# Altium PCB BSPD.PcbDoc
Units mil, origin at the board's own origin, x right, y up, seen from the top; angles counter-clockwise.
Board outline 2490 x 2755 mil, 4 copper layers (Top Layer, 5V, GND, Bottom Layer), stack 23.756 mil thick; 30 components, 27 nets, 148 pads, 2 vias.
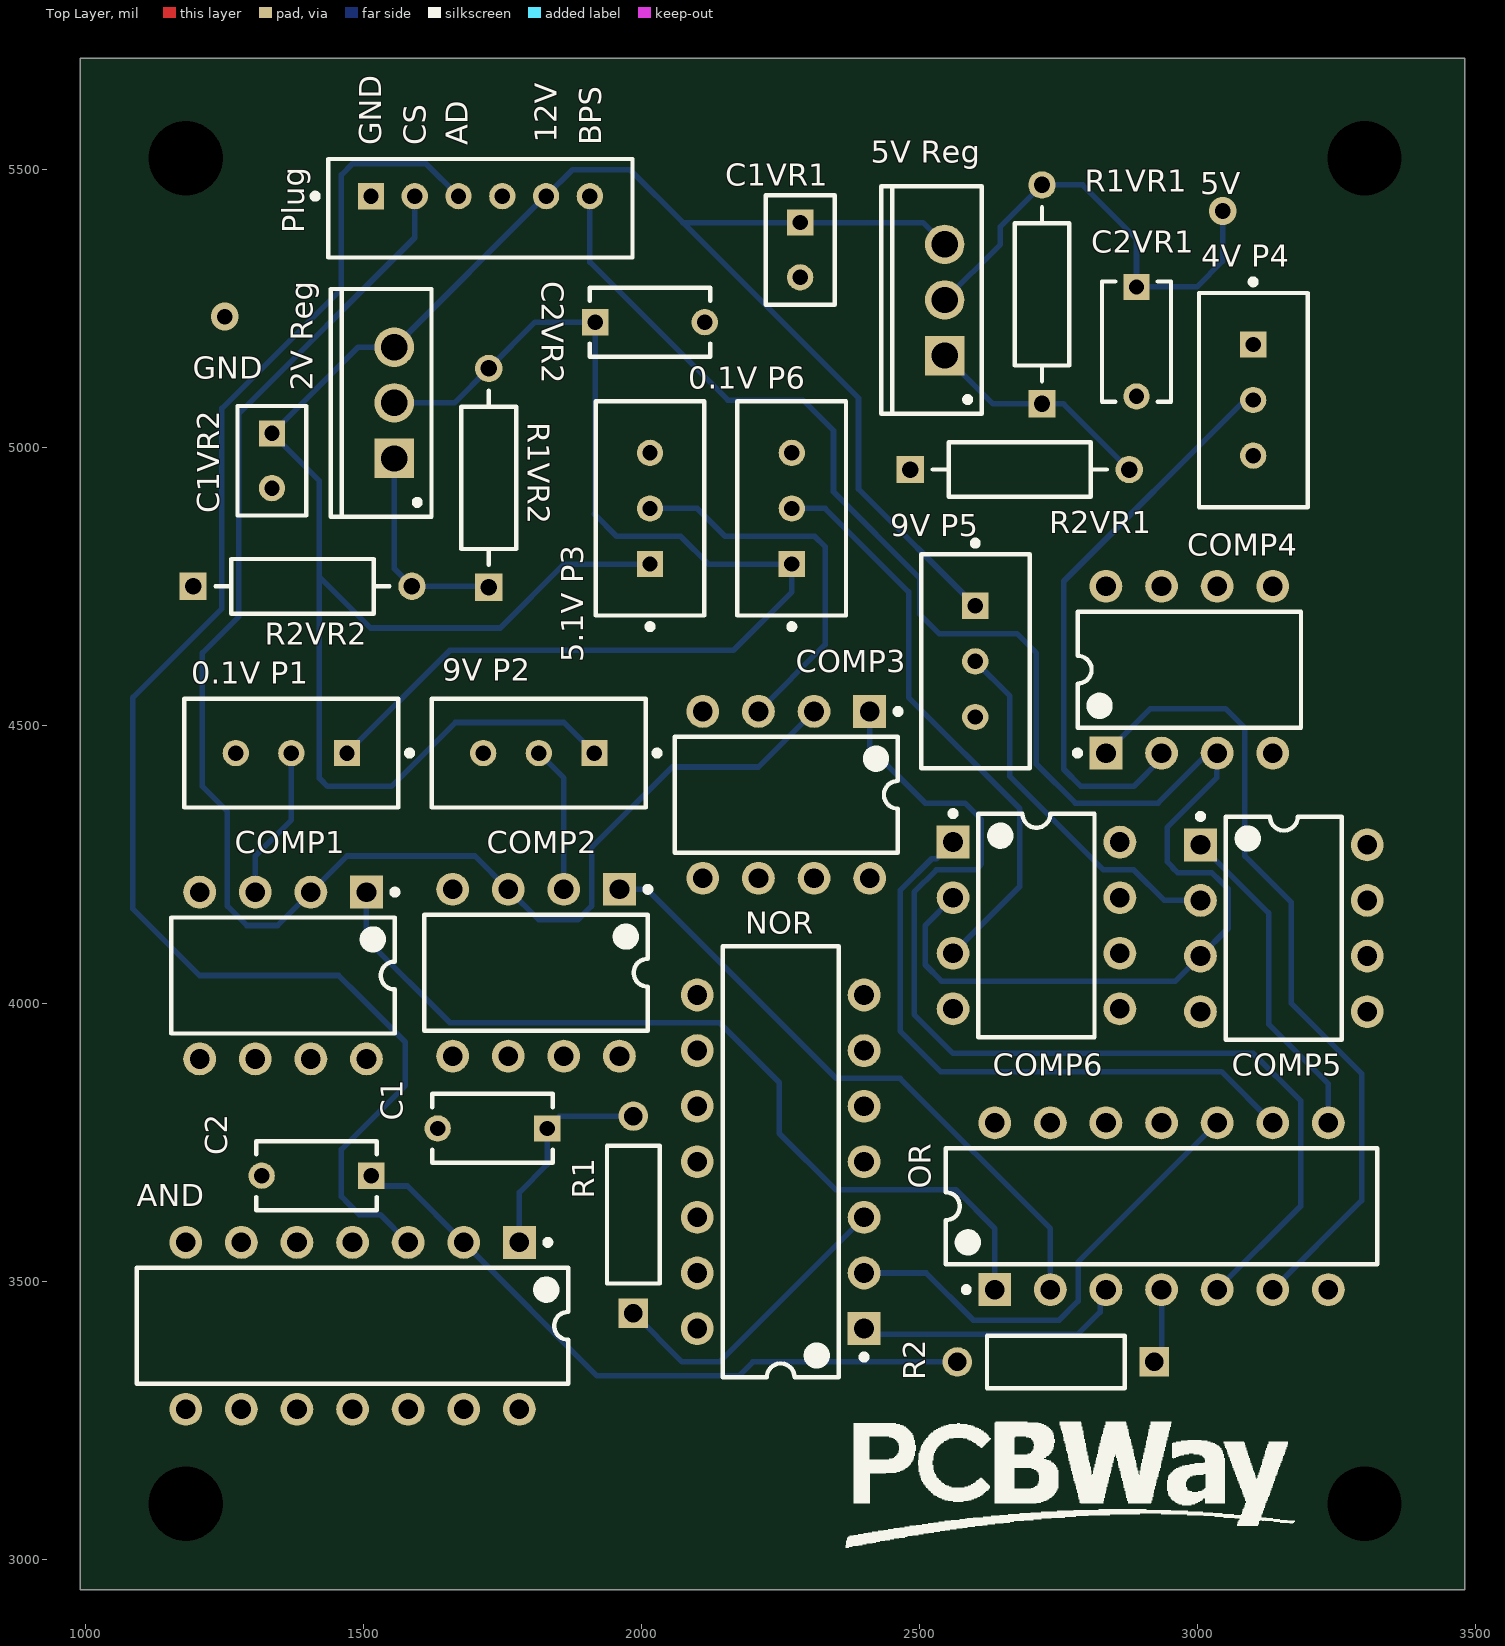
[diagram p0: Top Layer view]
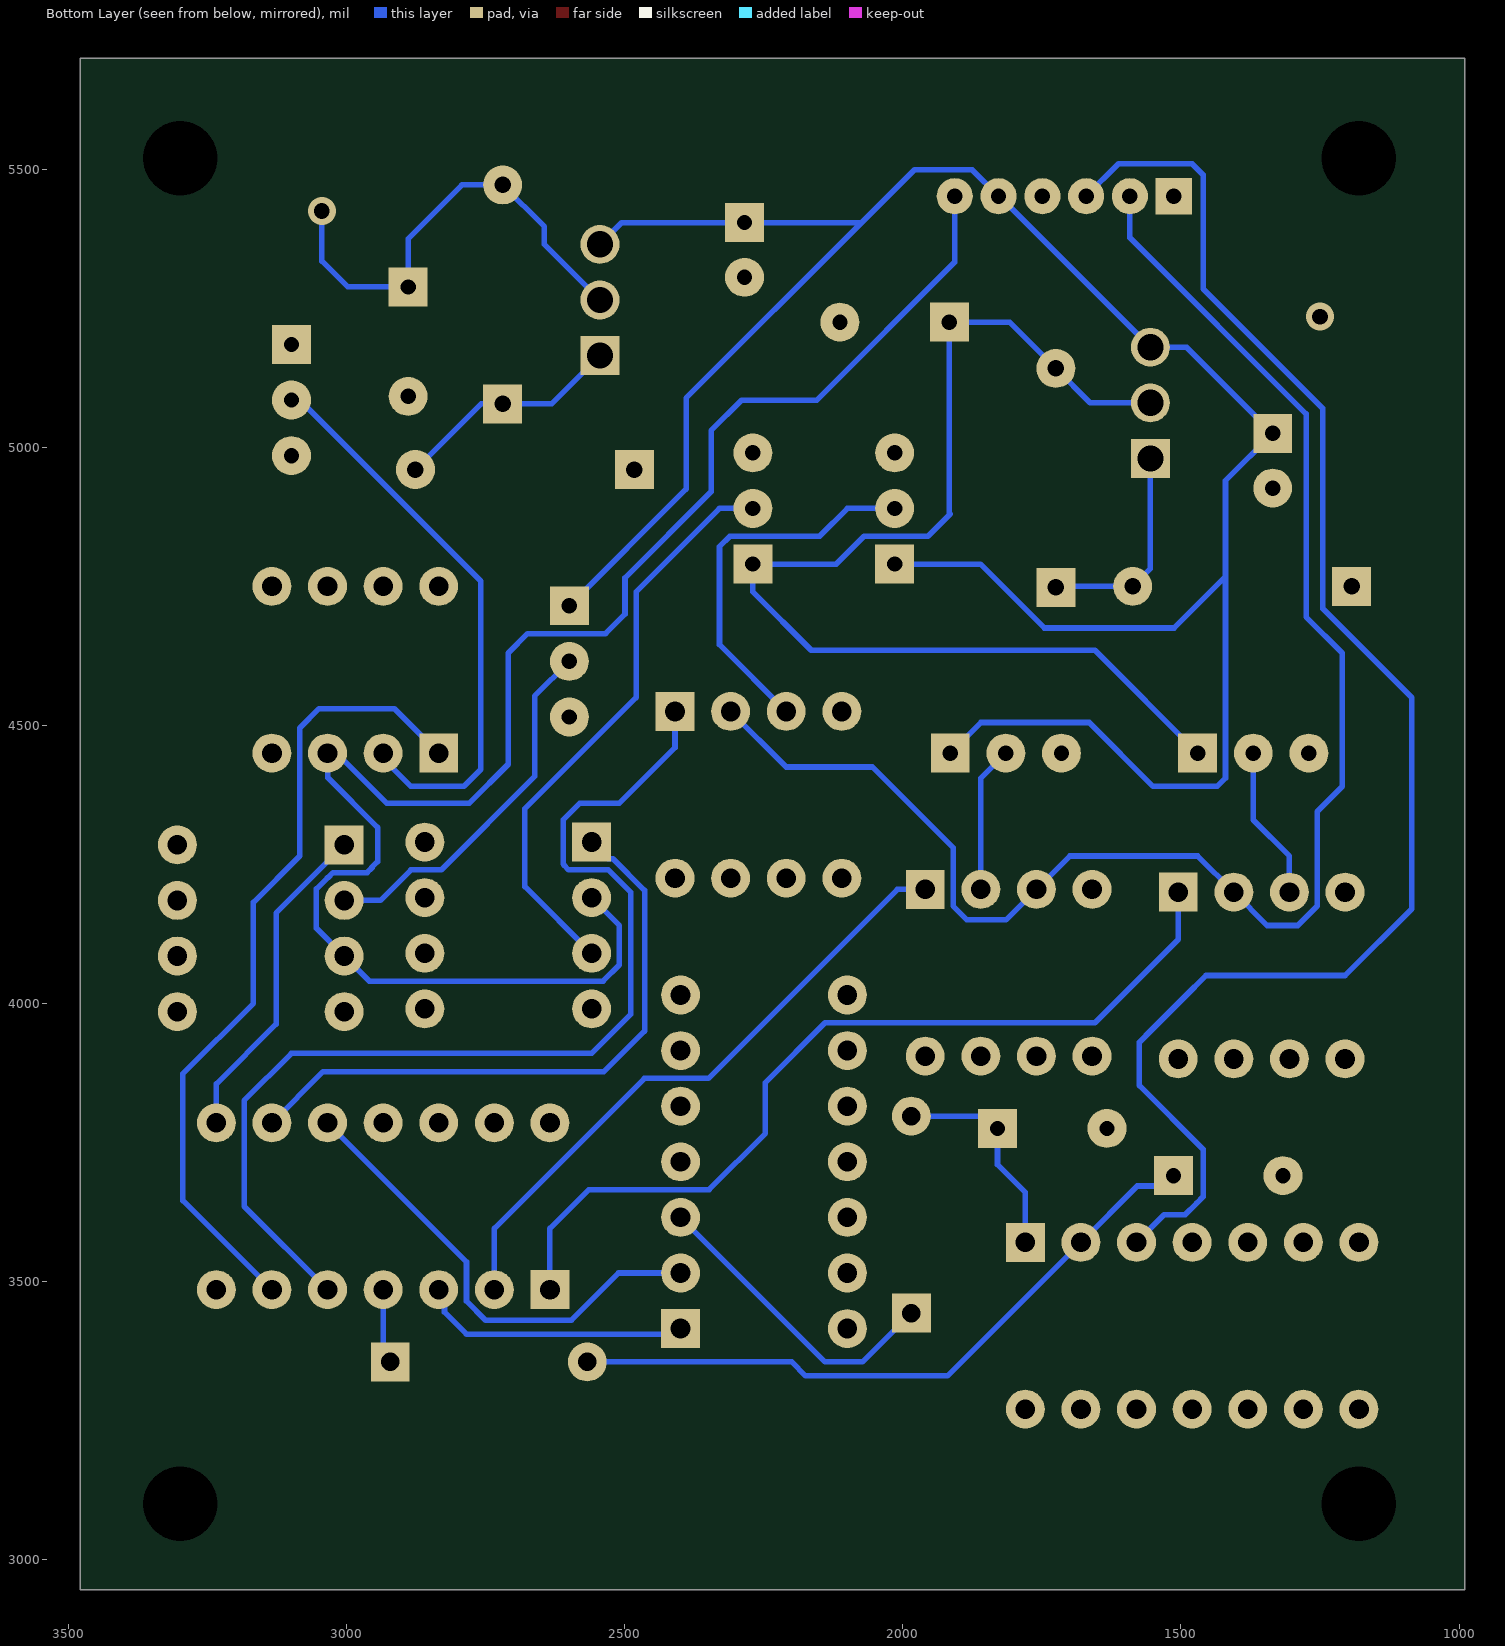
[diagram p1: Bottom Layer view, seen from below]
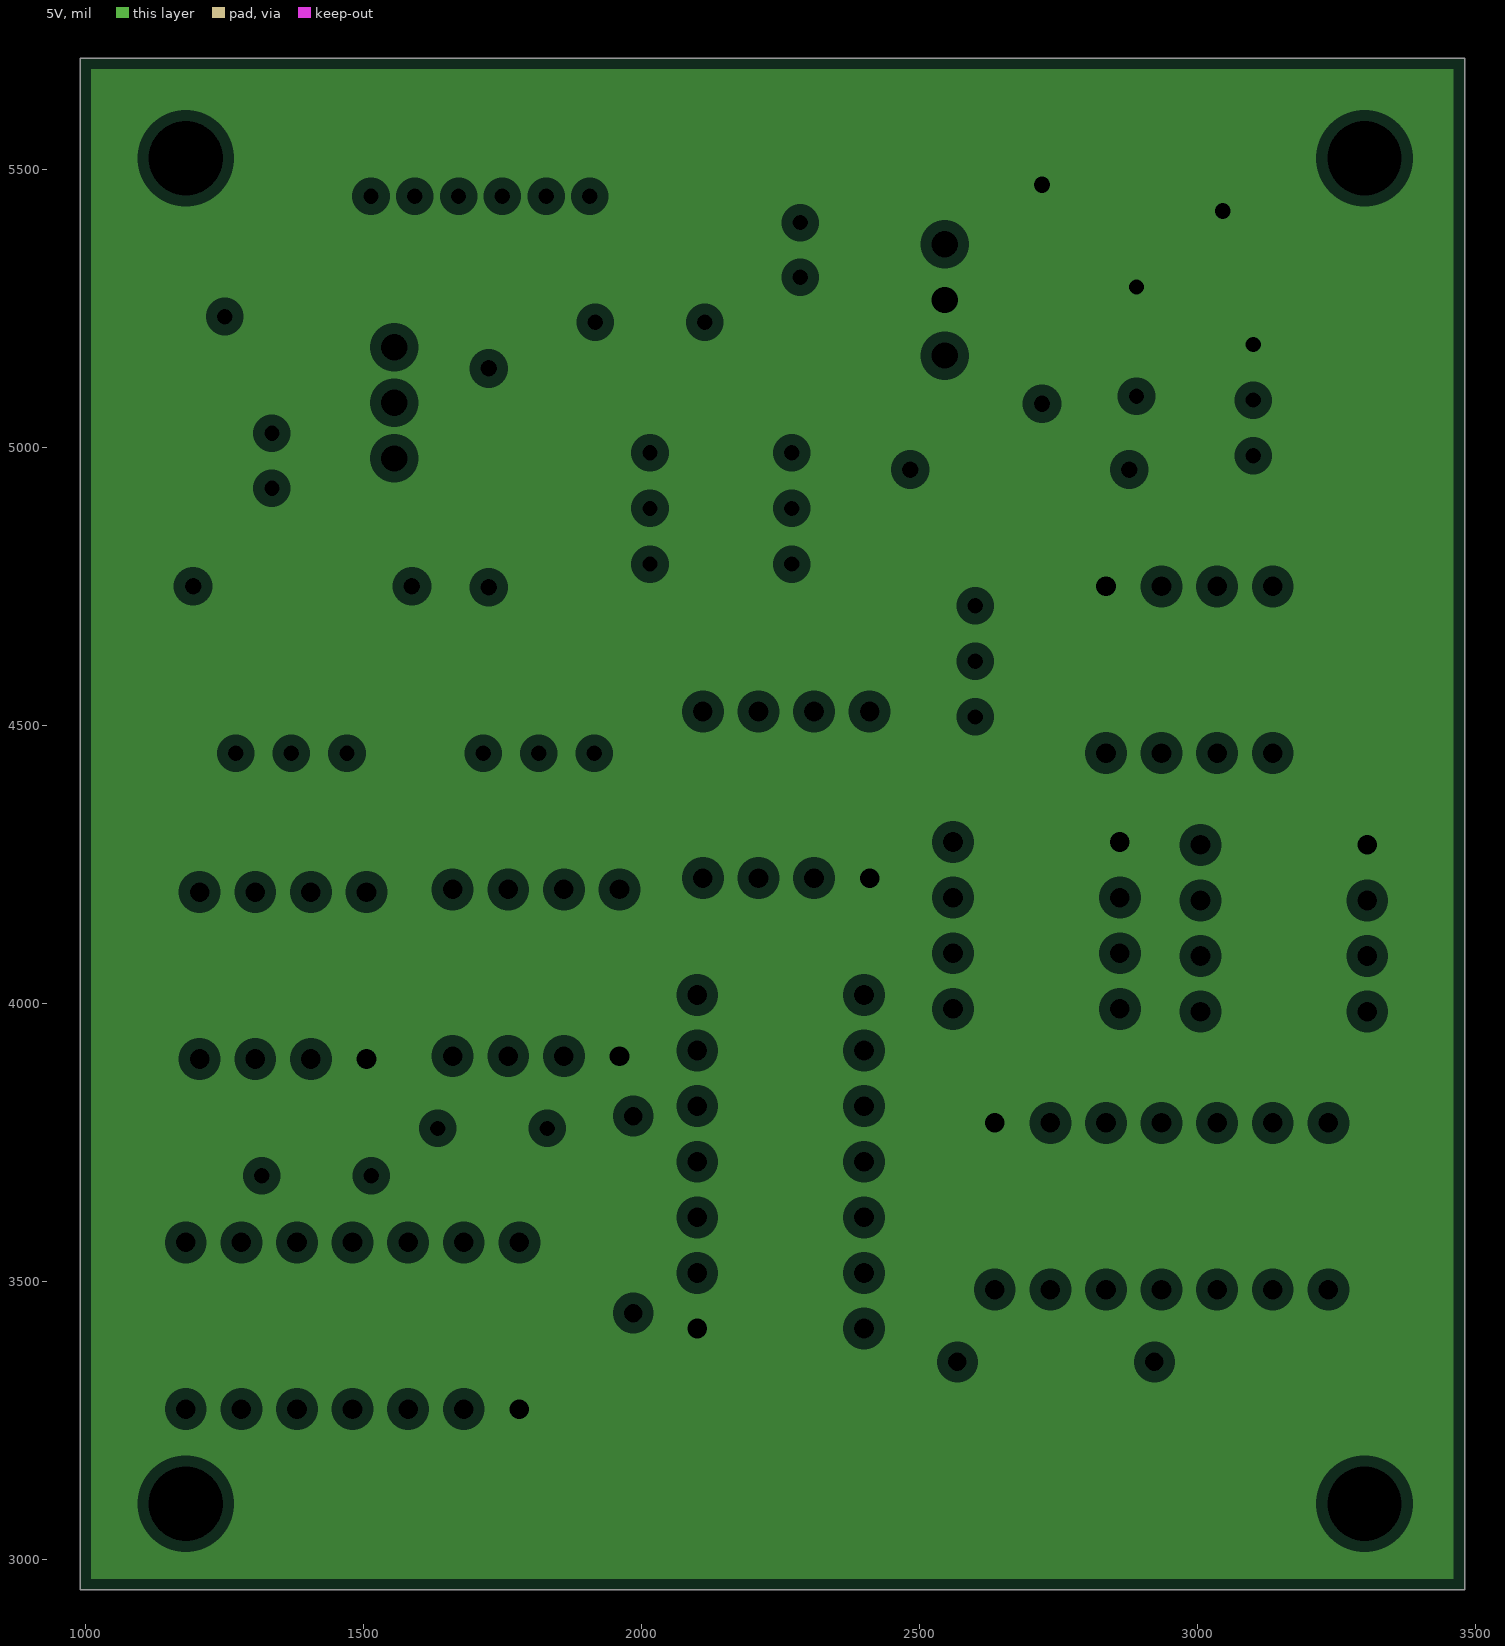
[diagram p2: 5V, clearances drawn from the general rule]
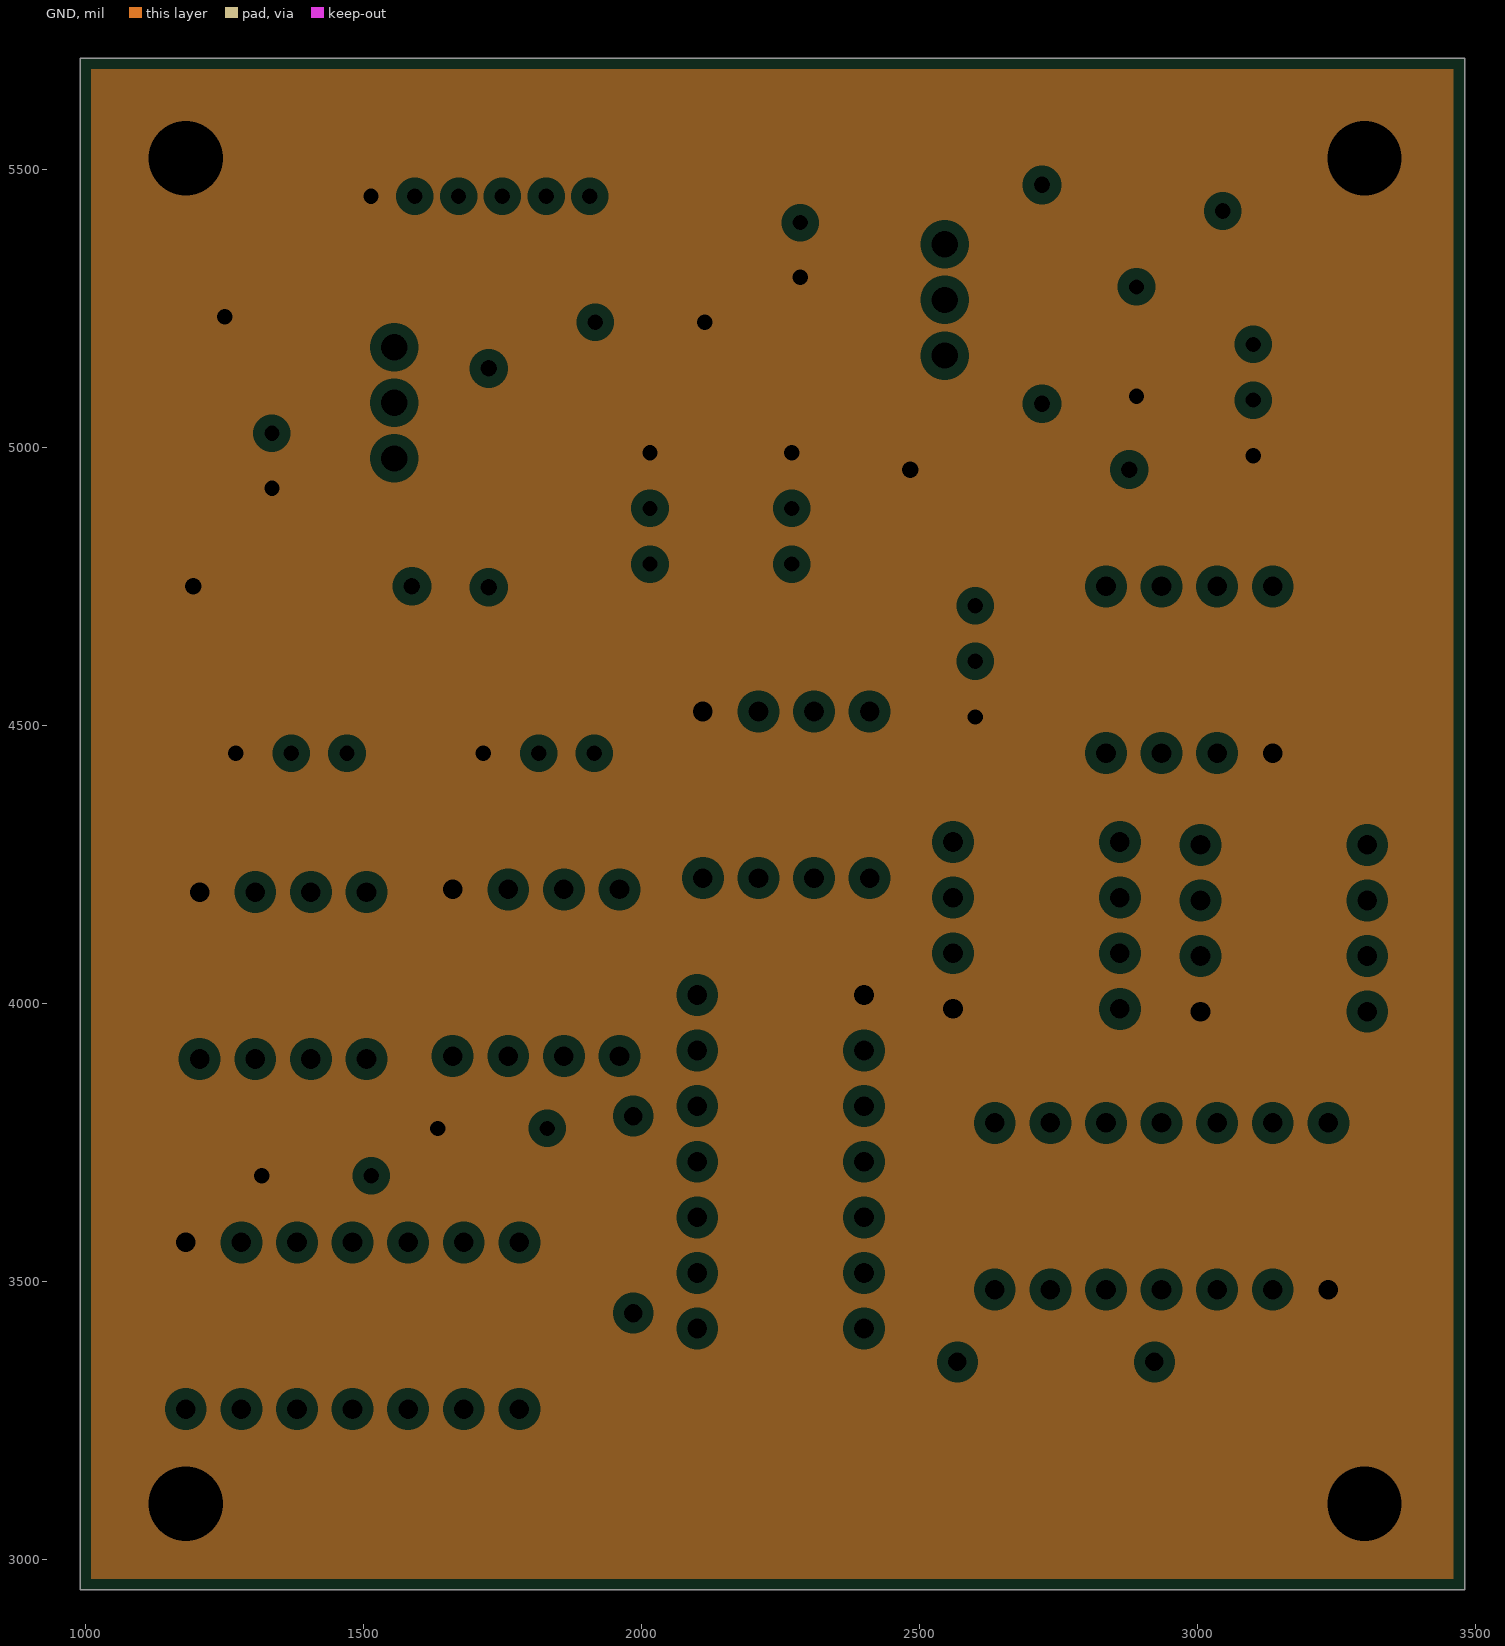
[diagram p3: GND, clearances drawn from the general rule]
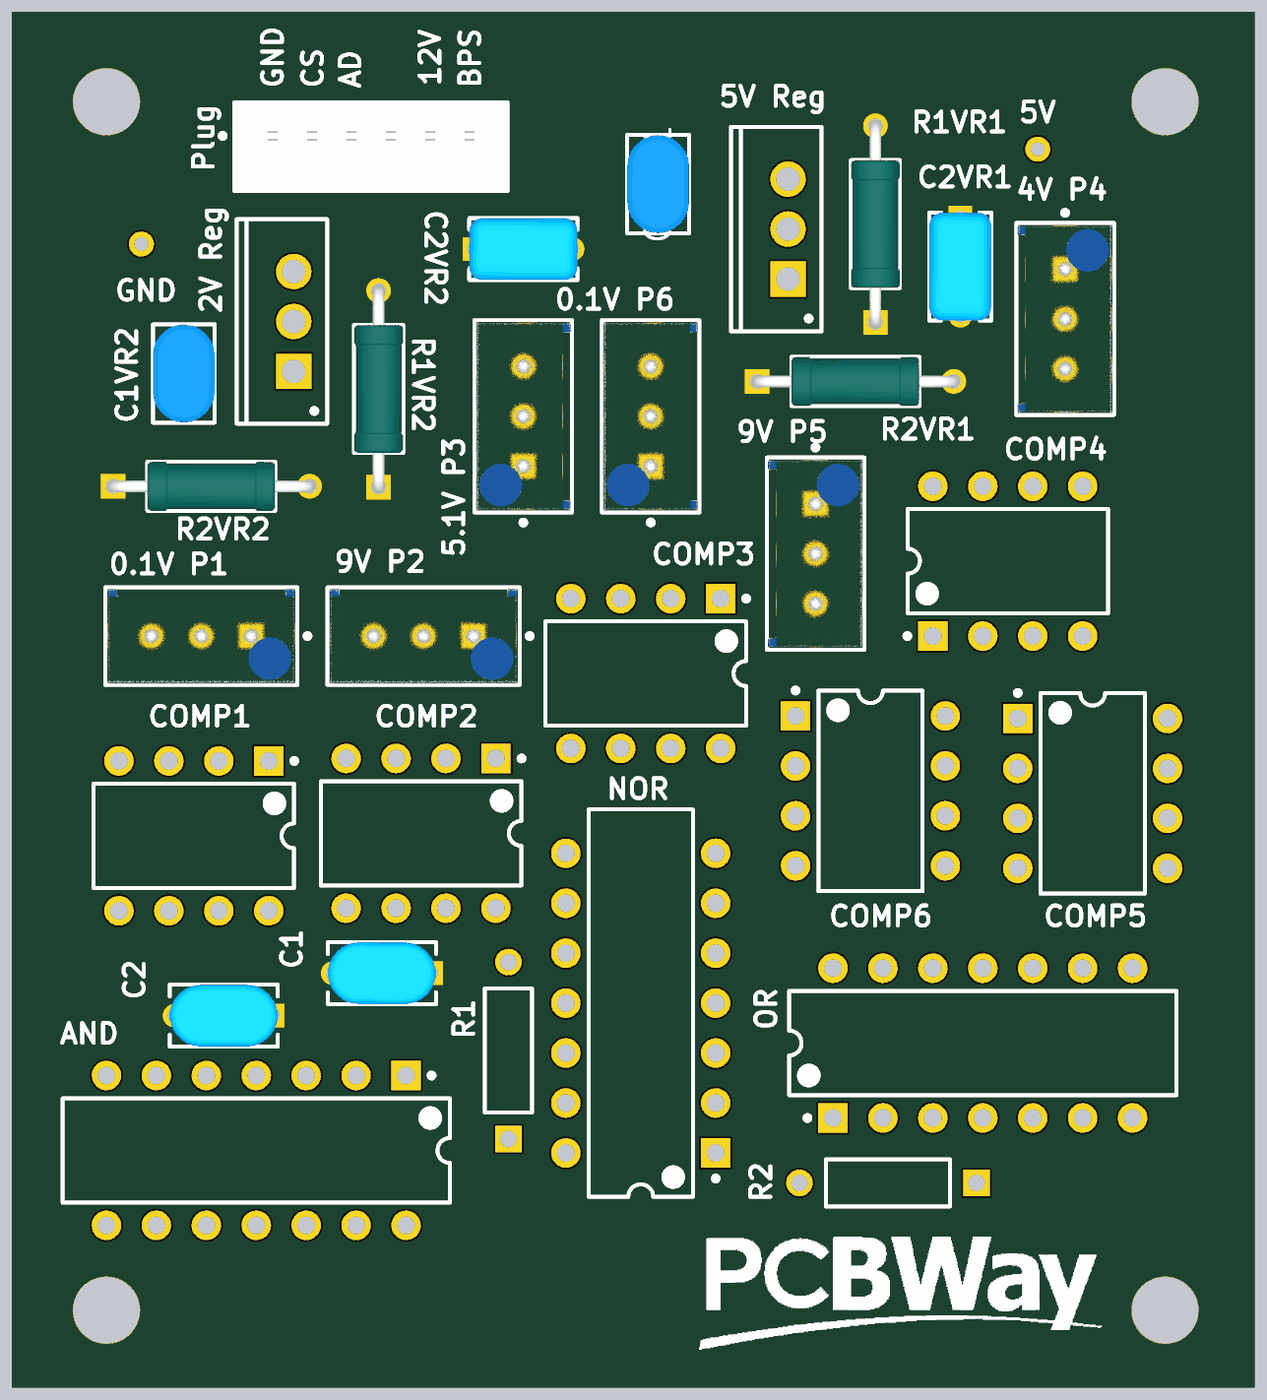
[diagram p4: 3D render of the assembled board from above, using the file's embedded part models]

## Layer stack, top to bottom
Top Solder: solder mask 0.4, Solder Resist, Dk 3.5
Top Layer: signal copper 1.4
Dielectric 2: prepreg 2.8, PP-006, Dk 4.1
5V: plane copper 1.378, net 5V
Dielectric 1: dielectric 12.6, FR-4, Dk 4.8
GND: plane copper 1.378, net GND
Dielectric 3: prepreg 2.8, PP-006, Dk 4.1
Bottom Layer: signal copper 1.4
Bottom Solder: solder mask 0.4, Solder Resist, Dk 3.5

## Board outline
3480,5700 990,5700 990,2945 3480,2945

## Design rules (kind name [scope] priority, off if disabled: settings)
Clearance [All] p1: gap=10 ignorepadtopadclearanceinfootprint=FALSE ismatrix=TRUE
HoleSize [All] p1: absolutevalues=TRUE maxlimit=200 minlimit=1 maxpercent=80.000 minpercent=20.000
PlaneClearance [All] p1: clearance=20
PlaneConnect [All] p1: planeconnectstyle=Relief reliefexpansion=20 reliefentries=4 reliefconductorwidth=10 reliefairgap=10
PolygonConnect [All] p1: connectstyle=Relief reliefconductorwidth=10 reliefentries=4 polygonreliefangle="90 Angle" airgapwidth=10
RoutingVias [All] p1: holewidth=28 width=50 viastyle="Through Hole" minholewidth=28 minwidth=50 maxholewidth=28 maxwidth=50
SolderMaskExpansion [All] p1: expansion=4 istentingtop=FALSE
SupplyNets "Schematic Supply Nets" [InNet('GND')] p1: voltage=0.000
Width [All] p1: maxlimit=10 minlimit=10 preferedwidth=10
27 further rules are at their usual default settings.

## Components (designator, comment, footprint, x,y, rotation, side; value= is the part's Value field where it differs from the comment)
"0.1V P1" "3296W-1-103LF" FP-3296W-MFG 1370,4449.8 r90 top
"0.1V P6" "3296W-1-103LF" FP-3296W-MFG 2269.8,4890 r0 top
"2V Reg" "LM317P" TO220FP 1555,5080 r90 top
"4V P4" "3296W-1-103LF" FP-3296W-MFG 3100,5085 r180 top
"5.1V P3" "3296W-1-103LF" FP-3296W-MFG 2014.8,4890 r0 top
"5V Reg" "LM317P" TO220FP 2545,5265 r90 top
"9V P2" "3296W-1-103LF" FP-3296W-MFG 1815,4449.8 r90 top
"9V P5" "3296W-1-103LF" FP-3296W-MFG 2600.2,4615 r180 top
AND "CD4081BE" N0014A 1480,3420 r270 top
C1 "RDER71H105K2M1H03A" FP-RDE2M1-MFG 1731.58,3775 r180 top
C1VR1 ".1uF" FP-RDE1P1-MFG 2285,5355 r270 top
C1VR2 ".1uF" FP-RDE1P1-MFG 1335,4975.79 r270 top
C2 "RDER71H105K2M1H03A" FP-RDE2M1-MFG 1415,3690 r180 top
C2VR1 "1uF" FP-RCE2K1-MFG 2890,5190 r270 top
C2VR2 "1uF" FP-RCE2K1-MFG 2015,5225 r0 top
COMP1 "LM393N" P0008A 1355,4050 r270 top
COMP2 "LM393N" P0008A 1810,4055 r270 top
COMP3 "LM393N" P0008A 2260,4375 r270 top
COMP4 "LM393N" P0008A 2985,4600 r90 top
COMP5 "LM393N" P0008A 3155,4135 r0 top
COMP6 "LM393N" P0008A 2710,4140 r0 top
NOR "CD4001BE" N0014A 2250,3715 r180 top
OR "CD4071BE" N0014A 2935,3635 r90 top
Plug "B6B-PH-K-K(LF)(SN)" FP-B6B-PH-K-K_LF_SN-MFG 1710,5430 r180 top
R1 "MFR-25FBF52-1K" RESA60-630X240 1985,3620 r90 top
R1VR1 "240" FP-MRS25-MFG 2720,5275 r90 top
R1VR2 "240" FP-MRS25-MFG 1725,4945 r90 top
R2 "MFR-25FBF52-1K" RESA60-630X240 2745,3355 r180 top
R2VR1 "140" FP-MRS25-MFG 2680,4960 r0 top
R2VR2 "240" FP-MRS25-MFG 1390,4750 r0 top

## Footprints (in the part's own frame and the unit in brackets; to place one, negate y for a bottom-side part, rotate by r counter-clockwise, add the part's x,y. Pads: shape width x height; smd on the part's side, far side on the other; paste and mask are expansions set on the pad)
FP-3296W-MFG [mm]
  rect 1.2x1.2 / inner rect 1.2x1.2 / far side rect 1.778x1.778 hole 0.7 paste-2539.97 mask+0: 1(0.005,-2.54)
  round 1.2 / inner round 1.2 / far side round 1.778 hole 0.7 paste-2539.97 mask+0: 2(0.005,0) 3(0.005,2.54)
  silkscreen extent -2.48,-5.53 2.48,4.89, body extent -2.58,-4.99 2.58,4.99, height 0.25
FP-B6B-PH-K-K_LF_SN-MFG [mm]
  rect 1.2x1.2 / inner rect 1.2x1.2 / far side rect 1.651x1.651 hole 0.7 paste-2539.97 mask+0: 1(5,-0.55)
  round 1.2 / inner round 1.2 / far side round 1.651 hole 0.7 paste-2539.97 mask+0: 2(3,-0.55) 3(1,-0.55) 4(-1,-0.55) 5(-3,-0.55) 6(-5,-0.55)
  silkscreen extent -6.95,-2.25 7.67,2.25, body extent -7.05,-2.35 7.05,2.35, height 0.25
FP-MRS25-MFG [mm]
  rect 1.25x1.25 / inner rect 1.25x1.25 / far side rect 1.778x1.778 hole 0.75 paste-2539.97 mask+0: 1(-5,0)
  round 1.25 / inner round 1.25 / far side round 1.778 hole 0.75 paste-2539.97 mask+0: 2(5,0)
  silkscreen extent -3.97,-1.25 3.98,1.25, body extent -5.72,-1.35 5.72,1.35, height 0.25
FP-RCE2K1-MFG [mm]
  rect 1.2x1.2 / inner rect 1.2x1.2 / far side rect 1.778x1.778 hole 0.7 paste-2539.97 mask+0: 1(-2.5,0)
  round 1.2 / inner round 1.2 / far side round 1.778 hole 0.7 paste-2539.97 mask+0: 2(2.5,0)
  silkscreen extent -2.75,-1.58 2.75,1.58, body extent -3.2,-1.68 3.2,1.68, height 0.25
FP-RDE1P1-MFG [mm]
  rect 1.2x1.2 / inner rect 1.2x1.2 / far side rect 1.778x1.778 hole 0.7 paste-2539.97 mask+0: 1(-1.25,0)
  round 1.2 / inner round 1.2 / far side round 1.778 hole 0.7 paste-2539.97 mask+0: 2(1.25,0)
  silkscreen extent -2.5,-1.58 2.5,1.58, body extent -2.6,-1.68 2.6,1.68, height 0.25
FP-RDE2M1-MFG [mm]
  rect 1.2x1.2 / inner rect 1.2x1.2 / far side rect 1.778x1.778 hole 0.7 paste-2539.97 mask+0: 1(-2.5,0)
  round 1.2 / inner round 1.2 / far side round 1.778 hole 0.7 paste-2539.97 mask+0: 2(2.5,0)
  silkscreen extent -2.75,-1.58 2.75,1.58, body extent -3.2,-1.68 3.2,1.68, height 0.25
N0014A [mm] "DIP, 14-Leads, Body 19.7x6.6mm, Pitch 2.54mm"
  rect 1.5x1.5 / inner rect 1.5x1.5 / far side rect 1.778x1.778 hole 0.9: 1(-3.81,7.62)
  round 1.5 / inner round 1.5 / far side round 1.778 hole 0.9: 2(-3.81,5.08) 3(-3.81,2.54) 4(-3.81,0) 5(-3.81,-2.54) 6(-3.81,-5.08) 7(-3.81,-7.62) 8(3.81,-7.62) 9(3.81,-5.08) 10(3.81,-2.54) 11(3.81,0) 12(3.81,2.54) 13(3.81,5.08) 14(3.81,7.62)
  silkscreen extent -3.93,-9.85 2.65,9.85, body extent -3.95,-9.85 3.95,9.85, height 5.08
P0008A [mm] "DIP, 8-Leads, Body 10.15x6.6mm, Pitch 2.54mm"
  rect 1.5x1.5 / inner rect 1.5x1.5 / far side rect 1.778x1.778 hole 0.9: 1(-3.81,3.81)
  round 1.5 / inner round 1.5 / far side round 1.778 hole 0.9: 2(-3.81,1.27) 3(-3.81,-1.27) 4(-3.81,-3.81) 5(3.81,-3.81) 6(3.81,-1.27) 7(3.81,1.27) 8(3.81,3.81)
  silkscreen extent -3.93,-5.1 2.65,5.24, body extent -3.95,-5.07 3.95,5.07, height 5.08
RESA60-630X240 [mm] "Axial Resistor, 2-Leads, Dia 2.4mm, Body Length 6.3mm"
  rect 1.35x1.35 / inner rect 1.35x1.35 / far side rect 1.778x1.778 hole 0.85: 1(-4.5,0)
  round 1.35 / inner round 1.35 / far side round 1.778 hole 0.85: 2(4.5,0)
  silkscreen extent -3.15,-1.2 3.15,1.2, body extent -3.15,-1.2 3.15,1.2, height 2.4
TO220FP [mm] "TO, Thru-Hole, Vertical, Heatsink Mounted; 3 In-Line Leads; Pitch 2.54 mm"
  rect 1.8x1.8 / inner rect 1.8x1.8 / far side rect 1.778x1.778 hole 1.2: 1(-2.54,0)
  round 1.8 / inner round 1.8 / far side round 1.778 hole 1.2: 2(0,0) 3(2.54,0)
  silkscreen extent -5.2,-1.7 5.2,2.9, body extent -5.25,-1.75 5.25,2.95, height 20

## Part data
"0.1V P1" "0.1V P6" "4V P4" "5.1V P3" "9V P2" "9V P5": library part CMP-1747-00001-8, "TRIMMER 10K OHM 0.5W PC PIN TOP", Color=Blue, Insulation Resistance=1GR, Max Operating Temperature=125°C, Max Power Dissipation=500mW, Min Operating Temperature=-55°C, Package Quantity=50, Resistance=10kR, Resistance Tolerance=10%, Resistor Type=Cermet, Temperature Coefficient=100ppm/°C, Contact Plating=Tin, Depth=4.83mm, Height=11.55mm, Lead Free="Lead Free", Length=9.53mm, Military Standard=Not, Mount="Through Hole", Number of Turns=25, Packaging=Rail/Tube, Power Rating=500mW, Radiation Hardening=No, Reach SVHC Compliant=Yes, RoHS Compliant=Yes, Series=3296, Taper=Linear, Technology=CERMET, Termination=Pin, Tolerance=10%, Weight=0.03oz, Width=9.53mm
"2V Reg" "5V Reg": library part CMP-0244-00425-1, "1.5A, 1.2V to 37V Adjustable Voltage Regulator, 3-Pin TO-220FP", ComponentLink1Description="Manufacturer URL", ComponentLink1URL=http://www.st.com, ComponentLink2Description=Datasheet, ComponentLink2URL=http://www.st.com/internet/com/TECHNICAL_RESOURCES/TECHNICAL_LITERATURE/DATASHEET/CD00000455.pdf, DatasheetVersion=1/11/2011, PackageDescription="TO, Thru-Hole, Vertical, Heatsink Mounted; 3 In-Line Leads; Pitch 2.54 mm", PackageReference=TO220FP, PackageVersion=2011
AND: library part CMP-0777-00273-3, "CMOS Quad 2-Input AND Gate, N0014A, TUBE", F @ Nom Voltage(Max)(Mhz)=8, Generic Part Number=CD4081B, ICC @ Nom Voltage(Max)(mA)=0.015, Manufacturer="Texas Instruments", Operating Temperature Range(C)="-55 to 125", Rating=Military, tpd @ Nom Voltage(Max)(ns)=12, Voltage(Nom)(V)=10, Bits(#)=4, DatasheetVersion=SCHS057C, Input Type=CMOS, Output Drive (IOL/IOH)(Max)(mA)=-6.8/6.8, Output Type=CMOS, PackageReference=N0014A, Schmitt Trigger=No, Technology Family=CD4000, VCC(Max)(V)=18, VCC(Min)(V)=3
C1 C2: library part CMP-06035-045612-1, "Ceramic Capacitor 1uF ±10% 50V X7R Radial", Capacitance=1uF, Case/Package=Radial, Dielectric=X7R, Max Operating Temperature=125°C, Min Operating Temperature=-55°C, Package Quantity=2000, Resistor Type=Ceramic, Tolerance=10%, Voltage Rating=50V, Height=4mm, Height - Seated (Max)=0.236inch, Lead Diameter=0.5mm, Lead Free="Lead Free", Lead Pitch=0.197inch, Lead/Base Style=Kinked, Length=0.217inch, Mount="Through Hole", Packaging="Tape and Reel", Termination=Radial, Voltage Rating (DC)=50V, Width=4mm
C1VR1 C1VR2: library part CMP-06035-033965-1, "Ceramic Capacitor 100nF ±10% 100V X7R Radial", Capacitance=100nF, Case/Package=Radial, Dielectric=X7R, Max Operating Temperature=125°C, Min Operating Temperature=-55°C, Package Quantity=1, Resistor Type=Ceramic, Tolerance=10%, Voltage Rating=100V, Height=3.5mm, Height - Seated (Max)=0.197inch, Lead Diameter=0.5mm, Lead Free="Lead Free", Lead Pitch=0.098inch, Lead/Base Style="Formed Leads", Length=0.177inch, Mount="Through Hole", Packaging="Tape and Reel", Termination=Radial, Voltage Rating (DC)=100V, Width=0.124inch
C2VR1 C2VR2: library part CMP-06035-007361-1, "Cap Ceramic Monolithic 1uF 100V 10% Thru-Hole Bulk", Case/Package=Radial, Dielectric=X7R, Max Operating Temperature=125°C, Min Operating Temperature=-55°C, Package Quantity=2000, Ratings=AEC-Q200, Resistor Type=Ceramic, Tolerance=10%, Voltage Rating=100V, Capacitance=1uF, Height=4mm, Height - Seated (Max)=0.157inch, Lead Diameter=0.5mm, Lead Free="Lead Free", Lead Pitch=0.197inch, Lead/Base Style="Formed Leads", Length=0.217inch, Mount="Through Hole", Packaging="Tape and Reel", Termination=Radial, Voltage Rating (DC)=100V, Width=0.124inch
COMP1 COMP2 COMP3 COMP4 COMP5 COMP6: library part CMP-0055-00119-3, "Low Power Low Offset Voltage Dual Comparator, 8-pin MDIP", Manufacturer="Texas Instruments", Package Reference=P0008A, PackageTopMarking=NSUZXYTTE#*LM*393N, PowerWise=N, Code_JEDEC=MS-001-BA, ComponentLink1Description="Datasheet URL", ComponentLink1URL=http://www.ti.com/general/docs/lit/getliterature.tsp?genericPartNumber=LM393-N&fileType=pdf, CompType=Amplifiers, PackageDescription="MDIP, .365 x .250 x .130in, 8 Lead, .100in Pitch", PinCount=8, RoHS=N
NOR: library part CMP-0806-00193-3, "CMOS Quad 2-Input NOR Gate, N0014A, TUBE", F @ Nom Voltage(Max)(Mhz)=8, Generic Part Number=CD4001B, ICC @ Nom Voltage(Max)(mA)=0.015, Manufacturer="Texas Instruments", Operating Temperature Range(C)="-55 to 125", Rating=Military, tpd @ Nom Voltage(Max)(ns)=120, Voltage(Nom)(V)=10, Bits(#)=4, Code_JEDEC=MS-001, DatasheetVersion=SCHS015C, Input Type=CMOS, Output Drive (IOL/IOH)(Max)(mA)=1.5/-1.5, Output Type=CMOS, PackageReference=N0014A, PackageVersion=http://www.ti.com/lit/ml/mpdi002c/mpdi002c.pdf, VCC(Max)(V)=18, VCC(Min)(V)=3
OR: library part CMP-1573-00144-3, "CMOS Quad 2-Input OR Gate, N0014A, TUBE", F @ Nom Voltage(Max)(Mhz)=8, Generic Part Number=CD4071B, ICC @ Nom Voltage(Max)(mA)=0.015, Manufacturer="Texas Instruments", Operating Temperature Range(C)="-55 to 125", Rating=Military, tpd @ Nom Voltage(Max)(ns)=120, Voltage(Nom)(V)=10, Bits(#)=4, Code_JEDEC=MS-001, DatasheetVersion=SCHS056D, Input Type=CMOS, Output Drive (IOL/IOH)(Max)(mA)=1.5/-1.5, Output Type=CMOS, PackageReference=N0014A, PackageVersion=http://www.ti.com/lit/ml/mpdi002c/mpdi002c.pdf, VCC(Max)(V)=18, VCC(Min)(V)=3
Plug: library part CMP-17439-000495-1, "PH Series 6 Position 2 mm Pitch Through Hole Top Entry Shrouded Header", Lead Free="Lead Free"
R1 R2: library part CMP-1659-00075-1, "Axial Resistor, 1 KOhm, +/- 1%, 250 mW, -55 to 155 degC, 2-Pin THD, RoHS, Bulk", Case\Package=Axial, Max Operating Temperature="155 degC", Min Operating Temperature="-55 degC", Package Quantity=200, Power Rating="250 mW", Resistance="10 kohm", Tolerance=1%, Voltage Rating="250 V", ComponentLink1Description="Manufacturer URL", ComponentLink1URL=http://www.yageo.com/, ComponentLink2Description=Datasheet, ComponentLink2URL=http://www.yageo.com/documents/recent/Yageo%20LR_MFR_2013.pdf, DatasheetVersion=Apr-13, Length="0.248 inch", PackageDescription="2-Pin Axial Lead, Dia 2.4 mm, Body Length 6.3 mm", PackageReference=MFR-25, Packaging=Bulk, RoHSCompliant=true
R1VR1 R1VR2 R2VR1 R2VR2: library part CMP-00030-42757237-1, "MRS25000C1000FRP00 Resistor, 100 Ohm, ± 1%, 600 mW, Axial Leaded, Metal Film (Thin Film), Professional", Case/Package=Axial, Max Operating Temperature=155°C, Max Power Dissipation=600mW, Min Operating Temperature=-55°C, Resistance=100Ω, Temperature Coefficient=50ppm/°C, Tolerance=1%, Voltage Rating=350V, Composition="Metal Film, Thin Film", Contact Plating=Tin, Diameter=2.5mm, Lead Diameter=600µm, Lead Free="Lead Free", Length=6.5mm, Military Standard=Not, Mount="Through Hole", NexarPartId=42757237, Number of Pins=2, Number of Terminations=2, Packaging="Tape & Reel (TR)", Power Rating=600mW, Radiation Hardening=No, REACH SVHC=Unknown, RoHS=Compliant, Schedule B="8533210090, 8533210090", Termination=Axial, Voltage Rating (DC)=350V, Width=2.5mm

## Free pads (board coordinates)
  round 60 / inner round 60 / far side round 70 hole 133.86: 4(1180,3100) 4(1180,5520) 4(3300,3100) 4(3300,5520)

## Via types
v1: diameter 50/50 (per signal layer), hole 28, Top Layer to Bottom Layer, 1 vias
v2: diameter 50, hole 28, Top Layer to Bottom Layer, 1 vias

## Nets (pads, with @x,y where several pads share a name; then routed paths per layer and width w, separated by ;. In a path a pad name is that pad's centre, name@x,y a point inside that pad or via, vN(x,y) a via of type N, cw(c..) or ccw(c..) an arc to the next point about the centre after c; other vN are vias at no path point)
2V: "0.1V P1.1" "0.1V P6.1" "2V Reg.2" C2VR2.1 R1VR2.2 | length 2129.7
  Bottom Layer w10: 1470,4450 1655,4635 2165,4635 2270,4740 2270,4790 2120,4790 2070,4840 1955,4840 1915,4880 1916.57,4881.57 C2VR2.1 1808.15,5225 R1VR2.2 1663.15,5080 1555,5080
5V: "4V P4.1" "5V Reg.2" AND.14 C2VR1.1 COMP1.8 COMP2.8 COMP3.8 COMP4.8 COMP5.8 COMP6.8 NOR.14 OR.14 R1VR1.2 | length 840.3
  Bottom Layer w10: 2545,5265 2645,5365 2645,5396.85 R1VR1.2 2793.15,5471.85 2890,5375 C2VR1.1 2998.43,5288.43 3045,5335 v2(3045,5425)
12V: "2V Reg.3" "5.1V P3.1" "5V Reg.3" "9V P2.1" "9V P5.1" C1VR1.1 C1VR2.1 Plug.5 | length 4276.3
  Bottom Layer w10: Plug.5@1827.38,5452.38 1555,5180 1490,5180 C1VR2.1 1420,4940 1420,4767.5 ; Plug.5 1875.61,5499.15 1979.27,5499.15 2074.21,5404.21 ; 1915,4450 1860,4505 1665,4505 1550,4390 1435,4390 1421.87,4403.13 1420,4405.01 1420,4408.95 1420,4484.92 1420,4767.5 ; 2015,4790 1860.69,4790 1745.69,4675 1512.5,4675 1420,4767.5 ; 2545,5365 2505.79,5404.21 C1VR1.1 2074.21,5404.21 ; 2600,4715 2390,4925 2390,5088.42 2074.21,5404.21
"Accumulator Disconnect": AND.3 Plug.3 | length 2797.3
  Bottom Layer w10: AND.3@1580,3545 AND.3@1580,3554.97 ; AND.3 1530.22,3619.78 1492.44,3619.78 1472.21,3640 1460,3652.21 1460,3737.14 1575,3852.14 1575,3930 1552.57,3952.43 1494.13,4010.87 1455,4050 1205,4050 1085,4170 1085,4550 1245,4710 1245,5070 1460,5285 1460,5490 1480,5510 1612.28,5510 Plug.3
"Brake Pressure Sensor": COMP4.3 COMP5.3 COMP6.2 Plug.6 | length 3078.7
  Bottom Layer w10: Plug.6 1906.85,5333.15 2155,5085 2290,5085 2345,5030 2345,4920 2500,4765 2500,4700 2535,4665 2675,4665 2710,4630 2710,4430 2780,4360 2928.76,4360 3018.76,4450 COMP4.3 3034.64,4449.64 3034.64,4405.86 2945,4316.21 2945,4255 2955,4245 2955,4243.79 2963.79,4235 3025,4235 3034.52,4225.48 3035.23,4225.48 3055,4205.71 3055,4135 COMP5.3 2960,4040 2539.29,4040 2510,4069.29 2510,4140 COMP6.2
C1Plus: "0.1V P1.2" COMP1.3 | length 276.9
  Bottom Layer w10: COMP1.3 1305,4265 1370,4330 1370,4450
"C2 Minus": "9V P2.2" COMP2.2 | length 263.6
  Bottom Layer w10: 1815,4450 1860,4405 COMP2.2
C3Minus: "5.1V P3.2" COMP3.3 | length 689.4
  Bottom Layer w10: 2015,4890 2100,4890 2150,4840 2311.21,4840 2330,4821.21 2330,4645 COMP3.3
C4Minus: "4V P4.2" COMP4.2 | length 1033.3
  Bottom Layer w10: COMP4.2 2935,4440 2885,4390 2790,4390 2759.09,4420.91 2759.09,4759.09 3085,5085 3099.8,5085
C5Minus: "9V P5.2" COMP5.2 | length 667.7
  Bottom Layer w10: 2600,4615 2662.4,4552.61 2662.4,4408.12 2830.52,4240 2885,4240 2940,4185 COMP5.2
C6Plus: "0.1V P6.2" COMP6.3 | length 1054.7
  Bottom Layer w10: 2270,4890 2330,4890 2480,4740 2480,4550 2680,4350 2680,4210 COMP6.3
CMP1_OUT: COMP1.1 OR.1 | length 1593.9
  Bottom Layer w10: COMP1.1 1505,4115 1655,3965 2140,3965 2247.5,3857.5 2247.5,3766.2 2348.7,3665 2565,3665 2635,3595 OR.1
CMP2_OUT: COMP2.1 OR.2 | length 1137.7
  Bottom Layer w10: COMP2.1 2010,4205 2350,3865 2465,3865 2735,3595 OR.2
CMP3_OUT: COMP3.1 OR.5 | length 1923
  Bottom Layer w10: COMP3.1 2410,4460 2510,4360 2581.21,4360 2610.86,4330.36 2610.86,4250.86 2610,4250 2610,4248.79 2601.21,4240 2530,4240 2490,4200 2490,3980 2560,3910 3100,3910 3185,3825 3185,3635 OR.5
CMP4_OUT: COMP4.1 OR.6 | length 1460.9
  Bottom Layer w10: COMP4.1 2915,4530 3050,4530 3085,4495 3085,4265 3168.46,4181.54 3168.46,4000 3295,3873.46 3295,3645 OR.6
CMP5_OUT: COMP5.1 OR.8 | length 595.3
  Bottom Layer w10: COMP5.1 3127.57,4162.43 3127.57,3962.43 3235,3855 OR.8
CMP6_OUT: COMP6.1 OR.9 | length 1122.7
  Bottom Layer w10: COMP6.1 2530,4260 2521.72,4260 2464.76,4203.05 2464.76,3950.24 2537.81,3877.19 3042.81,3877.19 OR.9
"Current Sensor": COMP1.2 COMP2.3 COMP3.2 Plug.2 | length 2839.2
  Bottom Layer w10: Plug.2 1591.89,5376.89 1275,5060 1275,4695 1210,4630 1210,4390 1255,4345 1255,4175 1290,4140 1345,4140 COMP1.2 1470,4265 1700,4265 COMP2.3 1815,4150 1885,4150 1910,4175 1910,4280 2055,4425 2210,4425 COMP3.2
GND: "0.1V P1.3" "0.1V P6.3" "4V P4.3" "5.1V P3.3" "9V P2.3" "9V P5.3" AND.7 C1.2 C1VR1.2 C1VR2.2 C2.2 C2VR1.2 C2VR2.2 COMP1.4 COMP2.4 COMP3.4 COMP4.4 COMP5.4 COMP6.4 NOR.7 OR.7 pad.4 Plug.1 R2VR1.1 R2VR2.1
  other v1: 1250,5235
NORA_OUT: NOR.3 R1.1 | length 559.1
  Bottom Layer w10: R1.1 2072.83,3355 2140,3355 NOR.3
ORA_OUT: NOR.1 OR.3 | length 489.9
  Bottom Layer w10: NOR.1 2410,3405 2785,3405 2824.64,3444.64 2824.64,3474.64 OR.3
ORB_OUT: OR.4 R2.1 | length 138.4
  Bottom Layer w10: R2.1@2920,3357.17 R2.1 2935,3367.83 OR.4
ORC_OUT: NOR.2 OR.10 | length 858.7
  Bottom Layer w10: NOR.2 2511.64,3515 2593.71,3432.93 2596.64,3430 2750.71,3430 2785,3464.29 2785,3535 OR.10
R1_OUT: AND.1 C1.1 R1.2 | length 389.9
  Bottom Layer w10: AND.1 1780,3660 1830,3710 C1.1 1852.17,3797.17 R1.2
R2_OUT: AND.2 C2.1 R2.2 | length 1213.9
  Bottom Layer w10: C2.1 1532.05,3671.38 1578.62,3671.38 AND.2 1920,3330 2175,3330 2200,3355 R2.2
VR1_ADJ: "5V Reg.1" R1VR1.1 R2VR1.2 | length 416.8
  Bottom Layer w10: 2545,5165 2631.85,5078.15 R1VR1.1 2758.7,5078.15 R2VR1.2
VR2_ADJ: "2V Reg.1" R1VR2.1 R2VR2.2 | length 382.1
  Bottom Layer w10: 1555,4980 1555,4781.85 R2VR2.2 1723.15,4750 R1VR2.1
pads on no net: AND.4 AND.5 AND.6 AND.8 AND.9 AND.10 AND.11 AND.12 AND.13 COMP1.5 COMP1.6 COMP1.7 COMP2.5 COMP2.6 COMP2.7 COMP3.5 COMP3.6 COMP3.7 COMP4.5 COMP4.6 COMP4.7 COMP5.5 COMP5.6 COMP5.7 COMP6.5 COMP6.6 COMP6.7 NOR.4 NOR.5 NOR.6 NOR.8 NOR.9 NOR.10 NOR.11 NOR.12 NOR.13 OR.11 OR.12 OR.13 Plug.4

## Polygon pours and split planes (outlines as drawn)
5V on 5V (split plane): 3459.9,2965.1 1010.1,2965.1 1010.1,5679.9 3459.9,5679.9
GND on GND (split plane): 3459.9,2965.1 1010.1,2965.1 1010.1,5679.9 3459.9,5679.9

## Silkscreen, mask and mechanical layers (free items; w line width, h text height)
Top Overlay:
  drawing of 6 lines, arcs and shapes, not listed
  text "12V" at 1847,5548 h40 r90
  text "GND" at 1532,5543 h40 r90
  text "CS" at 1612,5543 h40 r90
  text "AD" at 1687,5543 h40 r90
  text "BPS" at 1927,5543 h40 r90
  text "5V" at 3005,5455 h40
  text "GND" at 1193,5123 h40